# Altium PCB S7CAS-PLEIADES-CARTE-MERE_P01.PcbDoc (part 3 of 3)
Units mil, origin at the board's own origin, x right, y up, seen from the top; angles counter-clockwise.
Board outline 5000 x 5000 mil, 4 copper layers (Top, Ground Plane, Power Plane, Bottom), stack 67.086 mil thick; 430 components, 327 nets, 2174 pads, 171 vias.
Unrouted connection lines stored in the file: 1387.
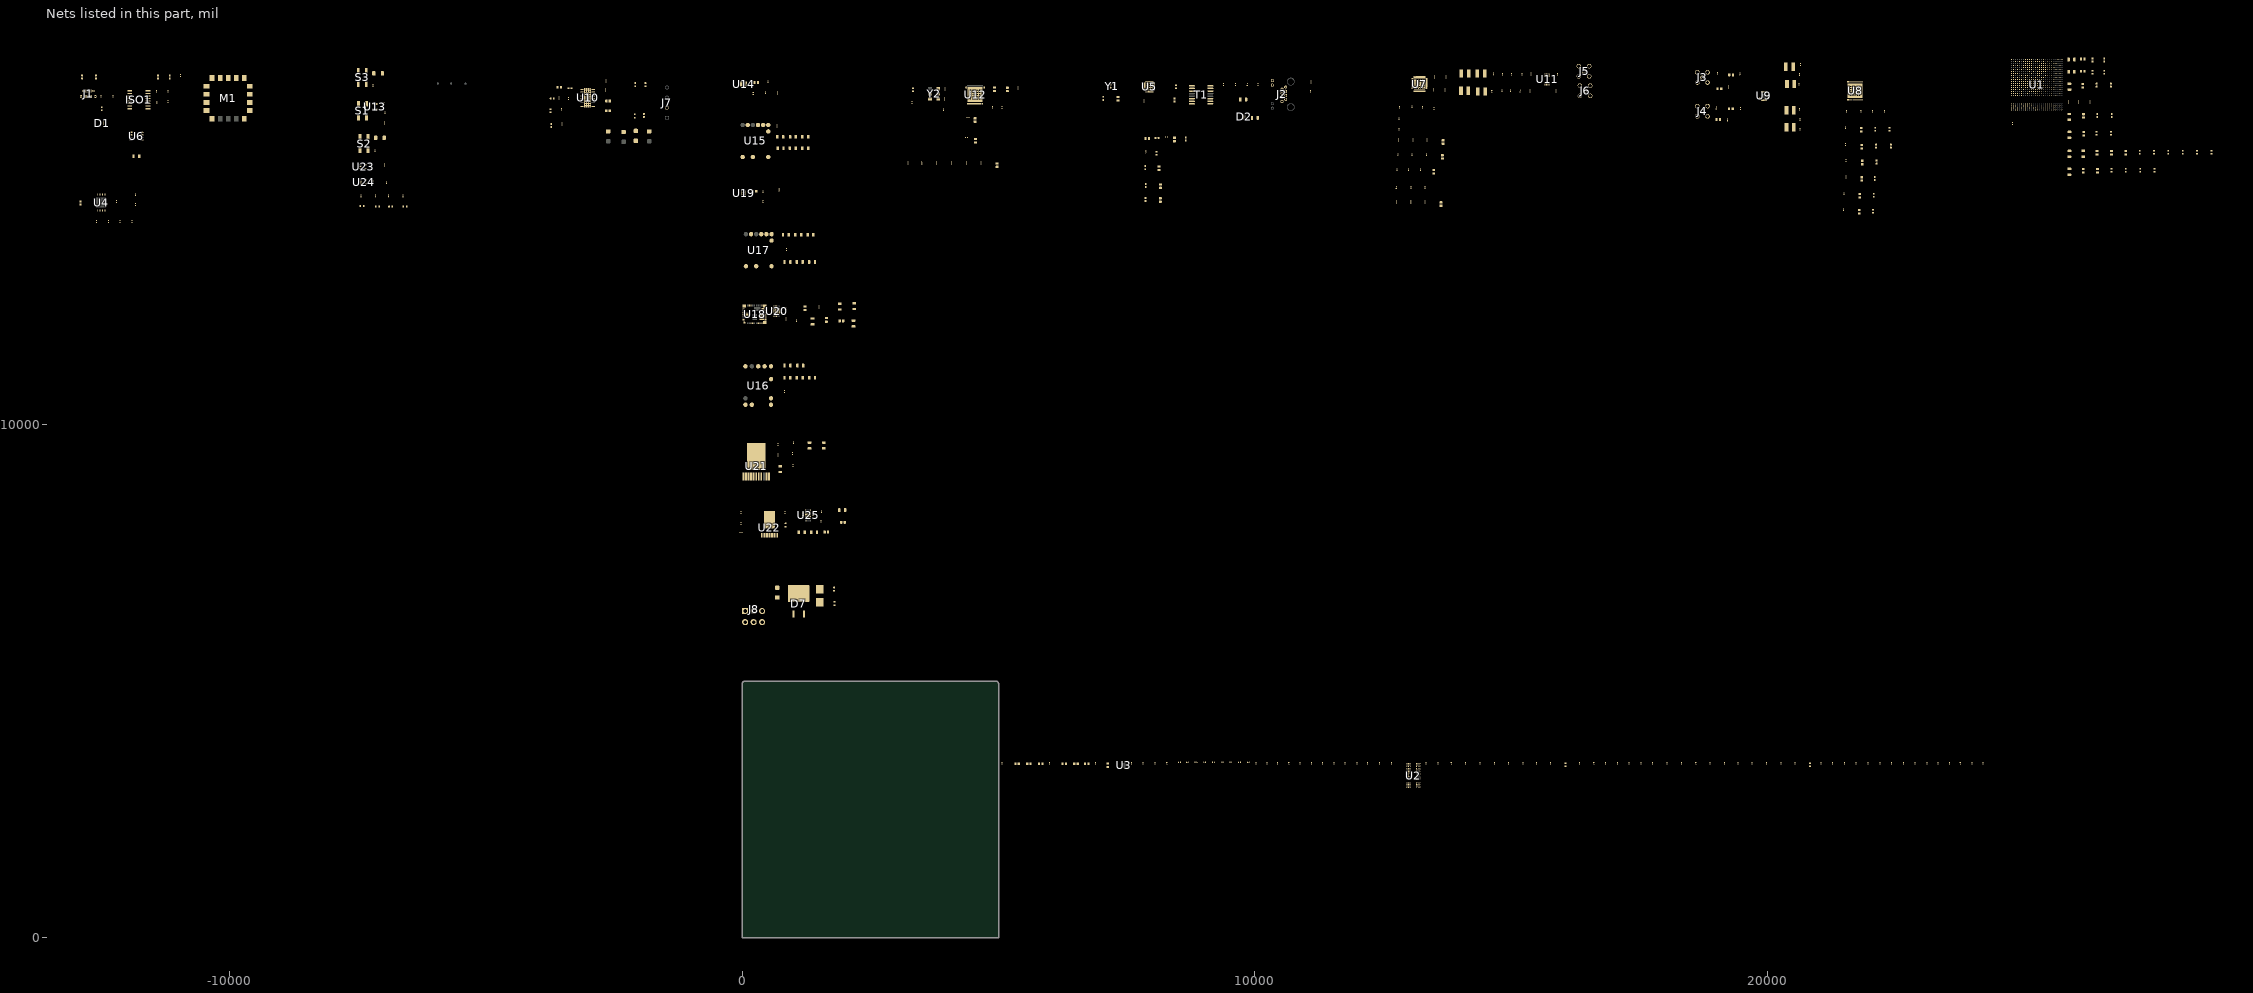
[diagram p5: the nets of this part, all layers, seen from the top]

## Part data (continued)
R126: "102 kOhms ±0.05% 0.125W, 1/8W Chip Resistor 0805 (2012 Metric) Anti-Sulfur, Automotive AEC-Q200, Moisture Resistant Thin Film", Mfg Part Number=TNPU0805102KAYEA00, Package=0805, CreatedBy="Jonathan Bouchard", Mfg="Vishay Dale", Precision=1%
R127: "65.7 kOhms ±0.5% 0.1W, 1/10W Chip Resistor 0603 (1608 Metric) Thin Film", Mfg Part Number=RT0603DRE0765K7L, Package=0603, CreatedBy="Jonathan Bouchard", Mfg=YAGEO, Precision=1%
R133: "25.5 kOhms ±0.1% 0.063W, 1/16W Chip Resistor 0402 (1005 Metric) Automotive AEC-Q200 Thin Film", Mfg Part Number=ERA-2AEB2552X, Package=0402, Power=1/16W, Voltage=50V, CreatedBy="Jonathan Bouchard", Mfg="Panasonic Electronic Components", Precision=1%
S1 S2 S3: library part SWI_TACT_B3SN-3012P_1, "SWI - SWITCH TACTILE SPST-NO 0.05A 24V -SMD", Current Rating=50mA, Manufacturer #1="Omron Electronics Inc-EMC Div", Package=SMD, Supplier Part Number 1=SW261CT-ND, Temperature="-25°C ~ 70°C", Voltage Rating=24VDC, CreatedBy/Date="Olivier Bernard / 5/12/2017", Cryo=UNKNOWN, GRAMS Lib Spec=2.8, HelpURL=http://omronfs.omron.com/en_US/ecb/products/pdf/en-b3sn.pdf, Magnetic Material=UNKNOWN, Mfg Part Number=B3SN-3012P, Part Number #1=B3SN-3012P, Polarized=No, Supplier 1=Digi-Key, VerifiedBy="Caroline Paulin / 11 juillet 2018"
T1: library part TRANSFO_H1102NLT, "TRANSFO - ETHERNET 10/100B-TX - SMD-16", Package=SMD-16, Supplier Part Number 1=553-1532-1-ND, Temperature="-40°C to 85°C", CreatedBy="Jonathan Bouchard", HelpURL=http://media.digikey.com/pdf/Data%20Sheets/Pulse%20PDFs/10_100BASE-T%20Single%20Port%20SMD%20Magnetics_Rev2008.pdf, Mfg="Pulse Eng.", Mfg Part Number=H1102NLT, Part Number #1=H1102NLT, Supplier 1=Digikey
U1: library part FPGA_XC6SLX100-3FGG676C, "FPGA - XILINX SPARTAN 6 480 I/O - BGA-676", Package=BGA-676, Supplier Part Number 1=122-1760-ND, Temperature="0°C ~ 85°C (TJ)", Voltage="1.14 V ~ 1.26 V", CreatedBy="Jonathan Bouchard", HelpURL=https://www.xilinx.com/support/documentation/data_sheets/ds162.pdf, Mfg=Xilinx, Mfg Part Number=XC6SLX100-3FGG676C, Part Number #1=XC6SLX100-3FGG676C, Supplier 1=Digikey
U2: library part "MEM_DDR3_MT41J128M16JT-125:K TR", "MEM - DDR3 SDRAM 2GBIT 800MHZ - TFBGA-96", Package=TFBGA-96, Supplier Part Number 1=557-1611-1-ND, Temperature="0°C ~ 95°C (TC)", Voltage="1.425 V ~ 1.575 V", CreatedBy="Jonathan Bouchard", HelpURL=http://www.micron.com/~/media/Documents/Products/Data%20Sheet/DRAM/DDR3/2Gb_DDR3_SDRAM.pdf, Mfg=Micrel, Mfg Part Number=MT41J128M16JT-125, Part Number #1=MT41J128M16JT-125, Supplier 1=Digikey
U3: library part REG_PMIC_TPS51200DRCT, "REG - DDR TERMINATION/REF REG - 10-VFDFN", Current Rating="Source: 3A~4.5A, Sink: 3.5A~5.5A", Manufacturer #1="Texas Instruments", Package=10-VFDFN, Supplier Part Number 1=296-23830-1-ND, Temperature="-40°C ~ 85°C", Voltage Rating="2.375V ~ 3.5V", CreatedBy/Date="Joel Lemay 2019-03-19", Cryo=UNKNOWN, GRAMS Lib Spec=2.8, HelpURL=http://www.ti.com/lit/ds/symlink/tps51200.pdf, Magnetic Material=Unknown, Mfg Part Number=TPS51200DRCT, Part Number #1=TPS51200DRCT, Polarized=Yes, Supplier 1=Digi-Key, VerifiedBy="Nicolas V. (2019-05-31)"
U4: library part CMP-0677-00004-1, "Low-Voltage, Serial Flash Memory with SPI Bus Interface, 128 Mbit, 54 MHz, 2.7 to 3.6 V, 8-Pin VDFPN (MLP), RoHS, Tape and Reel", Generic Part Number=M25P128, Supply Voltage Max="3.6 V", Supply Voltage Min="2.7 V", Temperature Max="85 degC", Temperature Min="-40 degC", DatasheetVersion="Rev. 6", Memory Size="128 Mbits", Mfg Part Number=M25P128-VME6TGB, PackageDescription="8-Pin Very Thin Dual Flat Package No lead, Body 8 x 6 mm, Pitch 1.27 mm", Packing="Tape and Reel", Part Number #1=M25P128-VME6TGB, PartNumber=M25P128-VME6TGB, RoHS=TRUE
U5: library part COM_ETH_PHY_KSZ8091MNXCA, "COM - ETHERNET PHY 10/100 - QFN-32", Package=QFN-32, Supplier Part Number 1=576-4356-ND, Temperature="0°C ~ 70°C", Voltage="1.8V, 2.5V, 3.3V", CreatedBy="Jonathan Bouchard", HelpURL=http://ww1.microchip.com/downloads/en/DeviceDoc/00002275A.pdf, Mfg=Micrel, Mfg Part Number=KSZ8091MNXCA, Part Number #1=KSZ8091MNXCA, Supplier 1=Digikey
U6: library part ISO_SI8620BB-B-IS, "ISO - Dual-Channel Digital Isolator (default Low) - 8-SOIC", Manufacturer #1="Silicon Labs", Package=8-SOIC, Supplier Part Number 1=336-2567-ND, Temperature="-40°C ~ 125°C", Voltage Rating=2.5-5.5V, CreatedBy/Date="Joel Lemay 2018-06-05", Cryo=UNKNOWN, GRAMS Lib Spec=2.8, HelpURL=https://www.silabs.com/documents/public/data-sheets/si861x-2x-datasheet.pdf, Magnetic Material=Unknown, Mfg Part Number=SI8620BB-B-IS, Part Number #1=SI8620BB-B-IS, Polarized=Yes, Supplier 1=Digi-Key, VerifiedBy="Caroline Paulin - 12 sept 2018"
U7: library part DAC_AD9146BCPZ, "DAC - 16BIT SRL HIGH SPEED - QFN-48", Package=QFN-48, Supplier Part Number 1=AD9146BCPZ-ND, Temperature="-40°C ~ 85°C", Voltage="3.13 V ~ 3.47 V / 1.71 V ~ 1.89 V", CreatedBy="Jonathan Bouchard", HelpURL=http://www.analog.com/media/en/technical-documentation/data-sheets/AD9146.PDF, Mfg="Analog Devices Inc.", Mfg Part Number=AD9146BCPZ, Precision="16 Bit", Supplier 1=Digikey
U8: library part ADC_ADS62P48IRGCT, "ADC - 14 BIT 210MSPS SUAL - VQFN-64", Package=VQFN-64, Supplier Part Number 1=296-24611-1-ND, Temperature="-40°C ~ 85°C", Voltage="3.15 V ~ 3.6 V / 1.7 V ~ 1.9 V", CreatedBy="Jonathan Bouchard", HelpURL=http://www.ti.com/lit/ds/symlink/ads62p48.pdf, Mfg="Texas Instruments", Mfg Part Number=ADS62P48IRGCT, Precision="14 Bit", Supplier 1=Digikey
U9: library part OPAMP_ADA4927-2YCPZ-R2, "OPAMP - CFA 2.3GHZ - QFN-24", Current=65mA, Package=QFN-24, Supplier Part Number 1=ADA4927-2YCPZ-R2CT-ND, Temperature="-40°C ~ 105°C", Voltage="4.5 V ~ 11 V, ±2.25 V ~ 5.5 V", CreatedBy="Jonathan Bouchard", HelpURL=http://www.analog.com/media/en/technical-documentation/data-sheets/ADA4927-1_4927-2.pdf, Mfg="Analog Devices", Mfg Part Number=ADA4927-2YCPZ-R2, Supplier 1=Digikey
U10: library part POW_MOTOR_DRV8811PWPR, "POW - STEPPER MOTOR DRIVER - SOP-28", Package=SOP-28, Supplier Part Number 1=296-24591-1-ND, Temperature="-40°C ~ 150°C (TJ)", Voltage="3 V ~ 5.5 V / 8 V ~ 38 V", CreatedBy="Jonathan Bouchard", HelpURL=http://www.ti.com/lit/ds/symlink/drv8811.pdf, Mfg="Texas Instrument", Mfg Part Number=DRV8811PWPR, Supplier 1=Digikey
U11: library part OPAMP_AD8056ARMZ, "OPAMP - VFB 300MHZ - 8MSOP", Current=60mA, Package=MSOP-8, Supplier Part Number 1=AD8056ARMZ-REEL7CT-ND, Temperature="-40°C ~ 125°C", Voltage="8 V ~ 12 V, ±4 V ~ 6 V", CreatedBy="Jonathan Bouchard", HelpURL=http://www.analog.com/media/en/technical-documentation/data-sheets/AD8055_8056.pdf, Mfg="Analog Devices", Mfg Part Number=AD8056ARMZ, Supplier 1=Digikey
U12: library part TIM_CDCE62005RGZT, "TIM - CLK SYNTH JITTER CLEANER 3:5 - QFN-48", Package=QFN-48, Supplier Part Number 1=296-23947-1-ND, Temperature="-40°C ~ 85°C", Voltage="3 V ~ 3.6 V", CreatedBy="Jonathan Bouchard", HelpURL=http://www.ti.com/lit/ds/symlink/cdce62005.pdf, Mfg="Texas Instruments", Mfg Part Number=CDCE62005RGZT, Supplier 1=Digikey
U13: library part POW_RESET_TPS3808G01DBVR, "POW - VOLT SUPERVISOR ADJ - SOT23-6", Package=SOT23-6, Supplier Part Number 1=296-17188-6-ND, Temperature="-40°C ~ 125°C (TJ)", CreatedBy="Jonathan Bouchard", HelpURL=http://www.ti.com/lit/ds/symlink/tps3808.pdf, Mfg="Texas Instruments", Mfg Part Number=TPS3808G01DBVR, Supplier 1=Digikey
U14 U19: library part REG_LDO_NCP59744MN1ADJTBG, "REG - LINEAR POS ADJ 3A BIAS - 10-VFDFN", Current Rating=3A, Manufacturer #1="ON Semiconductor", Manufacturer #2=-, Package=10-VFDFN, Power Max=10.8W, Supplier Part Number 1=NCP59744MN1ADJTBGOSCT-ND, Temperature="-40°C ~ 125°C (TJ)", Voltage Rating="(Vout+VDO) ~ 5.5V", CreatedBy/Date="Raphael Bouchard / 2019-06-07", Cryo=UNKNOWN, GRAMS Lib Spec=2.8, HelpURL=https://www.onsemi.com/pub/Collateral/NCP59744-D.PDF, Magnetic Material=Unknown, Mfg Part Number=NCP59744MN1ADJTBG, Part Number #1=NCP59744MN1ADJTBG, Part Number #2=-, Polarized=Yes, Supplier 1=Digi-Key, Tolerance=-, VerifiedBy="C.Paulin - 13/06/2019"
U15 U17: library part REG_SWR_PTH04T231WAZ, "REG - MODULE PIP 6A 2.2V/5.5V - 10SMD", Current Rating="6A (out)", Manufacturer #1="Texas Instruments", Package=SMD, Supplier Part Number 1=296-21792-ND, Temperature="-40°C ~ 85°C", Voltage Rating="2.2-5.5V (Input)", CreatedBy/Date="Olivier Bernard / 6/5/2018", Cryo=UNKNOWN, HelpURL=http://www.ti.com/lit/ds/symlink/pth04t231w.pdf, Magnetic Material=UNKNOWN, Mfg Part Number=PTH04T231WAZ, Part Number #1=PTH04T231WAZ, Polarized=Yes, Supplier 1=Digi-Key, VerifiedBy="Caroline Paulin / 10 juillet 2018"
U16: library part REG_SWR_PTH08T241WAZ, "REG - MODULE PIP 10A 14VIN - 11-SMD", Current Rating="10A (out)", Manufacturer #1="Texas Instruments", Package=SMD, Supplier Part Number 1=296-21339-ND, Temperature="-40°C ~ 85°C", Voltage Rating="4.5-14V (Input), 0.69 - 5.5V (Out)", CreatedBy/Date="Olivier Bernard / 6/5/2018", Cryo=UNKNOWN, HelpURL=http://www.ti.com/lit/ds/symlink/pth08t241w.pdf, Magnetic Material=UNKNOWN, Mfg Part Number=PTH08T241WAZ, Part Number #1=PTH08T241WAZ, Polarized=Yes, Supplier 1=Digi-Key, VerifiedBy="Caroline Paulin / 10 juillet 2018"
U18: library part REG_SWR_LMZ34002RKGR, "REG - DC DC Converter -3V to -17V 2A - 41-B1QFN", Current Rating=2A, Manufacturer #1="Texas Instruments", Package=41-B1QFN, Power Max=15W, Supplier Part Number 1=296-44356-1-ND, Temperature="-40°C ~ 85°C", Voltage Rating=4.5-40V, CreatedBy/Date="P.Marcoux  20-06-2019", Cryo=UNKNOWN, GRAMS Lib Spec=2.8c, HelpURL=http://www.ti.com/lit/ds/symlink/lmz34002.pdf, Magnetic Material=Unknown, Mfg Part Number=LMZ34002RKGR, Part Number #1=LMZ34002RKGR, Polarized=Yes, Supplier 1=Digi-Key, VerifiedBy="C.Paulin - 22/01/2020"
U20: library part REG_LDO_TPS7A3301RGWR, "REG - LDO Negative Adjustable 1 Output -1.18V-33V 1A -  20-VQFN (5x5)", Current Rating=1A, Manufacturer #1="Texas Instruments", Package=20-VQFN, Supplier Part Number 1=296-39502-1-ND, Temperature="-40°C ~ 125°C", Voltage Rating=-36V, CreatedBy/Date="Keven Deslandes - 2018/10/11", Cryo=UNKNOWN, GRAMS Lib Spec=2.8, HelpURL=http://www.ti.com/lit/ds/symlink/tps7a33.pdf, Magnetic Material=Unknown, Mfg Part Number=TPS7A3301RGWR, Part Number #1=TPS7A3301RGWR, Polarized=Yes, Supplier 1=Digi-Key, VerifiedBy="Caroline Paulin - 11/12/2018"
U21: library part CMP-0069-02067-2, "10A SIMPLE SWITCHER® Power Module with 36V Maximum Input Voltage and Current Sharing, 11 pin TO-PMOD, 32 Rail", Manufacturer="Texas Instruments", PackageTopMarking=NSUZXYTTE#*LMZ23610, PowerWise=N, PackageDescription="TO-PMOD, 15 x 15 x 5.9 mm Body, 11 Lead, 1.27 mm Pitch, Surface Mount", PackageReference=NDY0011A, PinCount=11, RoHS=Y
U22: library part CMP-0069-02076-2, "3A SIMPLE SWITCHER® Power Module with 36V Maximum Input Voltage, 7 pin TO-PMOD, 250 Reel", Manufacturer="Texas Instruments", PackageTopMarking=NSUZXYTTE#*LMZ23603, PowerWise=N, ComponentLink1Description="Datasheet URL", ComponentLink1URL=http://www.ti.com/general/docs/lit/getliterature.tsp?genericPartNumber=LMZ23603&fileType=pdf, CompType=Switcher, PackageDescription="TO-PMOD-7, 10.16 x 9.85 x 4.57 mm Body, 7 Lead, 1.27mm Pitch, Surface Mount", PackageReference=NDW0007A, PinCount=7, RoHS=Y
U23 U24: library part SENS_TEMP_TC74A0-3.3VCTTR, "SENS - TEMPERATURE SENSOR I2C/SMBUS - SOT23-5", Package=SOT23-5, Supplier Part Number 1=TC74A0-3.3VCTDKR-ND, Temperature="-40°C ~ 125°C", Voltage="2.7 V ~ 5.5 V", CreatedBy="Jonathan Bouchard", HelpURL=http://ww1.microchip.com/downloads/en/DeviceDoc/21462D.pdf, Mfg=Microchip, Mfg Part Number=TC74A0-3.3VCTTR, Precision="±2°C (±3°C)", Supplier 1=Digikey
U25: library part REG_LDO_TPS7A4701RGWR, "REG - LINEAR POS ADJ 1A - 20VQFN", Current Rating=1A, Manufacturer #1="Texas Instruments", Manufacturer #2=TBD, Package="20-VQFN Exposed Pad", Supplier Part Number 1=296-37224-1-ND, Temperature="-40°C ~ 125°C", Tolerance=-, Voltage Rating="35V max", Assembly Type=SMD, CreatedBy/Date="L-P Gauthier / 2018-05-29", Cryo=UNKNOWN, GRAMS Lib Spec=2.8, HelpURL=http://www.ti.com/lit/ds/symlink/tps7a47.pdf, Magnetic Material=Unknown, Part Number #1=TPS7A4701RGWR, Part Number #2=TBD, Polarized=Yes, Supplier 1=Digi-Key, VerifiedBy="Caroline Paulin - 28 sept 2018"
Y1: library part OSC_ASDMB-25.000MHZ-LC-T, "OSC - 25MHz XO (Standard) LVCMOS - 4-SMD, No Lead", Manufacturer #1="Abracon LLC", Package="4-SMD, No Lead", Supplier Part Number 1=535-11730-1-ND, Temperature="-40°C ~ +85°C", Tolerance=±50ppm, Voltage Rating="1.8V ~ 3.3V", CreatedBy/Date="Joël Lemay 2019-03-29", Cryo=UNKNOWN, GRAMS Lib Spec=2.8, HelpURL=https://abracon.com/Oscillators/ASDMB.pdf, Magnetic Material=Unknown, Mfg Part Number=ASDMB-25.000MHZ-LC-T, Part Number #1=ASDMB-25.000MHZ-LC-T, Polarized=Yes, Supplier 1=Digi-Key, VerifiedBy="C. Paulin - 29 mai 2019"
Y2: library part OSC_590BD-BDG, "TIM - OSC PROG 125MHz ~ 214.999MHz LVDS 3.3V 7PPM EN/DS - 6-SMD", Current Rating="100 mA (supply)", Manufacturer #1="Silicon Labs", Package=6-SMD, Supplier Part Number 1=590BD-BDG-ND, Temperature="-40°C ~ 85°C", Voltage Rating="3.3V (supply)", CreatedBy/Date="from 590BD-CDG", Cryo=UNKNOWN, GRAMS Lib Spec=2.8, HelpURL=https://www.silabs.com/documents/public/data-sheets/Si590-591.pdf, Magnetic Material=UNKNOWN, Mfg Part Number=590BD-BDG, Part Number #1=590BD-BDG, Polarized=Yes, Supplier 1=Digi-Key, VerifiedBy="Caroline Paulin / 3/10/2019"

## Via types
v1: diameter 19.68, hole 7.87, Top to Bottom, 135 vias
v2: diameter 19.68, hole 11.81, Top to Bottom, 15 vias
v3: diameter 15.75, hole 7.87, Top to Bottom, 12 vias
v4: diameter 22, hole 12, Top to Bottom, 9 vias

## Nets (pads, with @x,y where several pads share a name; then routed paths per layer and width w, separated by ;. In a path a pad name is that pad's centre, name@x,y a point inside that pad or via, vN(x,y) a via of type N, cw(c..) or ccw(c..) an arc to the next point about the centre after c; other vN are vias at no path point)
1V2: C14.2 C38.2 C40.2 C134.2 C135.2 C136.2 C137.2 C138.2 C139.2 C140.2 U1.K11 U1.K17 U1.L10 U1.L12 U1.L14 U1.L16 U1.M11 U1.M13 U1.M15 U1.N12 U1.N14 U1.N16 U1.P11 U1.P13 U1.P15 U1.R12 U1.R14 U1.R16 U1.T11 U1.T13 U1.T15 U1.T17 U1.U10 U1.U16 U16.5 U16.6
5V: C41.2 C87.2 C88.2 C90.2 C91.2 C92.2 C96.2 C97.2 C98.2 C109.2 C110.2 R124.2 U15.2 U15.9 U16.2 U16.10 U17.2 U17.9 U19.1 U19.2 U19.4 U19.5 U21.10 U21.11
5V_AMP: C68.2 C188.2 C189.2 C190.2 C191.2 C213.2 C214.2 C215.2 C216.2 C217.2 C218.2 R133.2 U9.3 U9.4 U9.9 U9.10 U9.14 U9.20 U11.8 U25.1 U25.20
6V: C36.2 C82.2 C83.2 R127.2 U22.7 U25.13 U25.15 U25.16
+24V: C15.1 C72.2 C76.2 C81.2 C105.2 C108.2 D7.4 F1.2 R55.2 R107.2 R120.2 R135.2 U10.15 U10.28 U18.26 U21.1 U21.2 U22.1
-5V_AMP: C112.2 C192.2 C193.2 C194.2 C195.2 C207.2 C208.2 C209.2 C210.2 C211.2 C212.2 R125.2 U9.15 U9.16 U9.21 U9.22 U11.4 U20.1 U20.20
-8V: C61.2 C103.2 C104.2 R121.1 U18.1 U18.4 U18.5 U18.8 U18.9 U18.16 U18.17 U18.18 U18.19 U18.20 U18.29 U18.30 U18.32 U18.33 U18.34 U18.37 U18.40 U20.13 U20.15 U20.16
  other v2: 79.29,12116.14 110,12116.14 140.71,12116.14 79.29,12183.86 110,12183.86 140.71,12183.86
ANA_3V3: C102.2 C165.2 C166.2 C168.2 C169.2 C196.2 C197.2 C198.2 C199.2 R117.2 U7.37 U7.40 U7.45 U7.48 U8.16 U8.33 U8.34 U19.9 U19.10
CAN_CLK_N: C100.2 R60.1 U12.20
CAN_CLK_P: C99.2 R59.2 U12.19
CAN_CLKOUT_N: U1.A14 U8.57
CAN_CLKOUT_P: U1.B14 U8.56
CAN_CM: U8.23 U9.11 U9.17
CAN_CTRL1: U1.M3 U8.35
CAN_CTRL2: U1.M1 U8.36
CAN_CTRL3: U1.L2 U8.37
CAN_DA0_N: U1.G14 U8.40
CAN_DA0_P: U1.J14 U8.41
CAN_DA2_N: U1.D15 U8.42
CAN_DA2_P: U1.E14 U8.43
CAN_DA4_N: U1.C16 U8.44
CAN_DA4_P: U1.D16 U8.45
CAN_DA6_N: U1.F15 U8.46
CAN_DA6_P: U1.G16 U8.47
CAN_DA8_N: U1.E17 U8.50
CAN_DA8_P: U1.F17 U8.51
CAN_DA10_N: U1.E16 U8.52
CAN_DA10_P: U1.F16 U8.53
CAN_DA12_N: U1.A17 U8.54
CAN_DA12_P: U1.C17 U8.55
CAN_DB0_N: U1.H15 U8.60
CAN_DB0_P: U1.J15 U8.61
CAN_DB2_N: U1.C18 U8.62
CAN_DB2_P: U1.D18 U8.63
CAN_DB4_N: U1.D19 U8.2
CAN_DB4_P: U1.E19 U8.3
CAN_DB6_N: U1.G17 U8.4
CAN_DB6_P: U1.H16 U8.5
CAN_DB8_N: U1.C20 U8.6
CAN_DB8_P: U1.D21 U8.7
CAN_DB10_N: U1.E18 U8.8
CAN_DB10_P: U1.F18 U8.9
CAN_DB12_N: U1.D20 U8.10
CAN_DB12_P: U1.E20 U8.11
CAN_IN1_N: R88.1 U8.30
CAN_IN1_P: R87.1 U8.29
CAN_IN2_N: R74.1 U8.20
CAN_IN2_P: R70.1 U8.19
CAN_RESET: U1.K8 U8.12
CAN_SCLK: U1.L8 U8.13
CAN_SDATA: U1.N1 U8.14
CAN_SDOUT: U1.L1 U8.64
CAN_SEN: U1.N2 U8.15
CCLK: R34.1 R35.2 U1.AD22 U4.6
CLK_1V8: C7.2 C8.2 C9.2 C55.2 C56.2 C59.2 C118.2 C130.2 C131.2 C132.2 C133.2 C200.2 C201.2 C202.2 C203.2 C204.2 C205.2 C206.2 U1.D2 U1.F4 U1.H2 U1.J6 U1.K4 U1.M2 U7.1 U7.2 U7.8 U7.29 U7.35 U8.1 U8.38 U8.48 U8.58 U15.4 U15.5
CLK_OSI_125M_OE: U1.U15 Y2.2
CLK_PLL_LOCK: U1.AD11 U12.37
CLK_PWRDN: U1.V14 U12.12
CLK_SPI_CLK: U1.AB11 U12.24
CLK_SPI_LE: U1.AA11 U12.25
CLK_SPI_MISO: R54.2 U1.W14
CLK_SPI_MOSI: U1.V13 U12.23
CLK_SYNC: U1.AC11 U12.14
CNA_CLK_N: C95.2 R91.1
CNA_CLK_P: C94.2 R72.2 U12.16 U12.17
CNA_CS: U1.H1 U7.33
CNA_D0_N: U1.D7 U7.28
CNA_D0_P: U1.E8 U7.27
CNA_D1_N: U1.C8 U7.26
CNA_D1_P: U1.D8 U7.25
CNA_D2_N: U1.E9 U7.24
CNA_D2_P: U1.F9 U7.23
CNA_D3_N: U1.A8 U7.22
CNA_D3_P: U1.B8 U7.21
CNA_D4_N: U1.A9 U7.16
CNA_D4_P: U1.C9 U7.15
CNA_D5_N: U1.F10 U7.14
CNA_D5_P: U1.E10 U7.13
CNA_D6_N: U1.C10 U7.12
CNA_D6_P: U1.D10 U7.11
CNA_D7_N: U1.A10 U7.10
CNA_D7_P: U1.B10 U7.9
CNA_DCI_N: U1.F11 U7.18
CNA_DCI_P: U1.D11 U7.17
CNA_FRAME_N: U1.A11 U7.20
CNA_FRAME_P: U1.C11 U7.19
CNA_IRQ: U1.G2 U7.34
CNA_RESET: U1.J2 U7.36
CNA_SCLK: U1.J1 U7.32
CNA_SDIO: U1.H3 U7.31
CNA_TX_ENABLE: U1.G1 U7.30
CONN_4_5: J2.4 J2.5 R51.2
CONN_7_8: J2.7 J2.8 R52.2
CSO_B: R39.1 U1.AF4 U4.1
DD_N: M1.16 R43.2
DD_P: M1.17 R45.2
DDR3_A0: R1.1 U1.N7 U2.N3
DDR3_A1: R2.1 U1.N6 U2.P7
DDR3_A2: R3.1 U1.R9 U2.P3
DDR3_A3: R4.1 U1.P7 U2.N2
DDR3_A4: R5.1 U1.N9 U2.P8
DDR3_A5: R6.1 U1.R2 U2.P2
DDR3_A6: R7.1 U1.R1 U2.R8
DDR3_A7: R8.1 U1.P10 U2.R2
DDR3_A8: R9.1 U1.N4 U2.T8
DDR3_A9: R10.1 U1.N3 U2.R3
DDR3_A10: R11.1 U1.M10 U2.L7
DDR3_A11: R12.1 U1.L3 U2.R7
DDR3_A12: R13.1 U1.M8 U2.N7
DDR3_A13: R14.1 U1.M6 U2.T3
DDR3_BA0: R15.1 U1.P3 U2.M2
DDR3_BA1: R16.1 U1.P1 U2.N8
DDR3_BA2: R17.1 U1.N5 U2.M3
DDR3_CAS: R22.1 U1.P8 U2.K3
DDR3_CK_N: R27.1 U1.R3 U2.K7
DDR3_CK_P: R26.2 U1.R4 U2.J7
DDR3_CKE: U1.M9 U2.K9
DDR3_CS: R20.1 R29.1 U2.L2
DDR3_DQ0: U1.Y3 U2.E3
DDR3_DQ1: U1.Y1 U2.F7
DDR3_DQ2: U1.W2 U2.F2
DDR3_DQ3: U1.W1 U2.F8
DDR3_DQ4: U1.T3 U2.H3
DDR3_DQ5: U1.T1 U2.H8
DDR3_DQ6: U1.U2 U2.G2
DDR3_DQ7: U1.U1 U2.H7
DDR3_DQ8: U1.AA2 U2.D7
DDR3_DQ9: U1.AA1 U2.C3
DDR3_DQ10: U1.AE2 U2.C8
DDR3_DQ11: U1.AE1 U2.C2
DDR3_DQ12: U1.AD3 U2.A7
DDR3_DQ13: U1.AD1 U2.A2
DDR3_DQ14: U1.AB3 U2.B8
DDR3_DQ15: U1.AB1 U2.A3
DDR3_LDM: U1.W3 U2.E7
DDR3_LDQS_N: U1.V1 U2.G3
DDR3_LDQS_P: U1.V3 U2.F3
DDR3_ODT: R24.1 U1.P6 U2.K1
DDR3_RAS: R21.1 U1.N8 U2.J3
DDR3_RESET: R25.2 U1.L4 U2.T2
DDR3_UDM: U1.V4 U2.D3
DDR3_UDQS_N: U1.AC1 U2.B7
DDR3_UDQS_P: U1.AC2 U2.C7
DDR3_WE: R23.1 U1.P5 U2.L3
DIN: R33.1 U1.AD20
DONE: R38.1 U1.AF23
ETH_3V3: C101.2 C106.2 C156.2 C157.2 L1.1 U5.3
ETH_COL: U1.AD21 U5.28
ETH_CRS: U1.Y18 U5.29
ETH_INTR: U1.AA19 U5.21
ETH_MDC: U1.AC20 U5.12
ETH_MDIO: U1.AF19 U5.11
ETH_RST: R57.2 U1.AE19 U5.32
ETH_RXC: U1.AE13 U5.19
ETH_RXD0: U1.V16 U5.16
ETH_RXD1: U1.W17 U5.15
ETH_RXD2: U1.AD18 U5.14
ETH_RXD3: U1.AF18 U5.13
ETH_RXDV: U1.AC19 U5.18
ETH_RXER: U1.AD19 U5.20
ETH_TXC: U1.AF13 U5.22
ETH_TXD0: U1.AA18 U5.24
ETH_TXD1: U1.AB18 U5.25
ETH_TXD2: U1.AE17 U5.26
ETH_TXD3: U1.AF17 U5.27
ETH_TXEN: U1.Y16 U5.23
ETH_TXER: U1.AA17 U5.31
FPGA_CLK_N: U1.AF14 U12.28
FPGA_CLK_P: U1.AD14 U12.27
GND_USB: C47.2 C119.1 C120.1 D1.4 ISO1.2 ISO1.8 J1.5 R46.1 U6.4
INIT_B: R36.1 U1.AE4
IO_BUTTON1: D8.K R105.2 S2.1 S2.2 U1.W11
IO_BUTTON2: D9.K R106.2 S3.1 S3.2 U1.AD8
IO_LED1: R100.2 U1.U13
IO_LED2: R101.2 U1.U12
IO_LED3: R102.2 U1.Y10
IO_LED4: R103.2 U1.AB10
IO_SCLK_TEMP1: R129.1 U1.AF8 U23.4
IO_SCLK_TEMP2: R131.1 U1.AD9 U24.4
IO_TEMP1: R130.1 U1.AC9 U23.5
IO_TEMP2: R132.1 U1.AA9 U24.5
LED: J2.9 R48.2 U5.30
M0: C1.2 C4.2 C5.2 C6.2 C25.2 C33.2 C34.2 C35.2 C37.2 C62.2 C63.2 C64.2 C65.2 C66.2 C67.2 C71.2 C85.2 C86.2 C117.2 C121.2 C122.2 C123.2 C124.2 C125.2 C141.2 C142.2 C143.2 C144.2 C145.2 C146.2 C147.2 C148.2 C149.2 C150.2 C151.2 C177.2 C178.2 C179.2 C180.2 C186.2 C187.2 C219.2 C220.2 C221.2 C222.2 C223.2 C224.2 C225.2 ISO1.12 ISO1.13 ISO1.14 ISO1.16 L1.2 L2.2 L3.2 M1.8 M1.15 R30.2 R34.2 R36.2 R37.2 R38.2 R39.2 R47.2 R58.2 R92.2 R95.2 R104.2 R105.1 R106.1 R108.2 R112.2 R129.2 R130.2 R131.2 R132.2 U1.AA6 U1.AA10 U1.AA16 U1.AA21 U1.AB14 U1.AB23 U1.AC10 U1.AC18 U1.AC21 U1.AD25 U1.AE8 U1.AE12 U1.AE16 U1.AE20 U1.AF22 U1.B3 U1.B7 U1.B11 U1.B15 U1.B19 U1.C22 U1.D9 U1.D17 U1.D25 U1.E13 U1.F6 U1.F21 U1.F23 U1.G10 U1.G12 U1.G15 U1.G18 U1.H14 U1.H25 U1.J9 U1.J18 U1.J21 U1.K13 U1.K23 U1.L5 U1.L22 U1.M17 U1.M20 U1.M25 U1.N10 U1.P23 U1.T25 U1.U6 U1.U14 U1.U18 U1.V9 U1.V21 U1.W23 U1.Y12 U1.Y17 U1.Y19 U1.Y25 U3.10 U4.3 U4.7 U4.8 U5.17 U6.8 U10.10 U12.1 U12.8 U12.11 U12.15 U12.18 U12.21 U12.26 U12.29 U12.32 U12.44 U12.47 U13.6 U14.1 U14.2 U14.4 U14.5 U17.4 U17.5 U23.3 U24.3 Y1.1 Y1.4 Y2.6
M1: C1.1 C2.1 C3.1 C4.1 C5.1 C6.1 C7.1 C8.1 C9.1 C10.2 C11.1 C12.1 C13.1 C14.1 C16.1 C17.1 C18.1 C19.1 C20.1 C21.1 C22.1 C23.1 C24.1 C25.1 C26.1 C27.1 C28.1 C29.1 C30.1 C31.1 C32.1 C33.1 C34.1 C35.1 C36.1 C37.1 C38.1 C39.1 C40.1 C41.1 C42.1 C43.1 C44.1 C45.1 C46.1 C47.1 C48.1 C49.1 C50.1 C55.1 C56.1 C57.1 C58.1 C59.1 C60.1 C61.1 C62.1 C63.1 C64.1 C65.1 C66.1 C67.1 C68.1 C69.1 C70.1 C71.1 C72.1 C73.1 C74.1 C75.1 C76.1 C78.1 C79.1 C80.1 C81.1 C82.1 C83.1 C84.1 C85.1 C86.1 C87.1 C88.1 C89.1 C90.1 C91.1 C92.1 C93.1 C96.1 C97.1 C98.1 C101.1 C102.1 C103.1 C104.1 C105.1 C106.1 C107.1 C108.1 C109.1 C110.1 C111.1 C112.1 C113.1 C114.1 C115.1 C116.1 C117.1 C118.1 C121.1 C122.1 C123.1 C124.1 C125.1 C126.1 C127.1 C128.1 C129.1 C130.1 C131.1 C132.1 C133.1 C134.1 C135.1 C136.1 C137.1 C138.1 C139.1 C140.1 C141.1 C142.1 C143.1 C144.1 C145.1 C146.1 C147.1 C148.1 C149.1 C150.1 C151.1 C152.1 C153.1 C154.1 C155.1 C156.1 C157.1 C158.1 C159.1 C160.1 C161.1 C162.1 C163.1 C164.1 C165.1 C166.1 C167.1 C168.1 C169.1 C170.1 C171.1 C172.1 C173.1 C174.1 C175.1 C176.1 C177.1 C178.1 C179.1 C180.1 C181.1 C182.1 C183.1 C184.1 C185.1 C186.1 C187.1 C188.1 C189.1 C190.1 C191.1 C192.1 C193.1 C194.1 C195.1 C196.1 C197.1 C198.1 C199.1 C200.1 C201.1 C202.1 C203.1 C204.1 C205.1 C206.1 C207.1 C208.1 C209.1 C210.1 C211.1 C212.1 C213.1 C214.1 C215.1 C216.1 C217.1 C218.1 C219.1 C220.1 C221.1 C222.1 C223.1 C224.1 C225.1 D3.K D4.K D5.K D6.K D7.1 D7.3 D8.A D9.A D10.K D15.2 D??.2 ISO1.9 ISO1.15 J3.2 J3.3 J3.4 J3.5 J4.2 J4.3 J4.4 J4.5 J5.2 J5.3 J5.4 J5.5 J6.2 J6.3 J6.4 J6.5 J8.4 J8.5 J8.6 M1.1 M1.7 M1.14 R25.1 R28.2 R29.2 R32.2 R35.1 R41.1 R48.1 R56.1 R57.1 R63.1 R65.2 R66.1 R73.1 R77.1 R78.1 R79.1 R84.1 R85.1 R86.1 R89.1 R93.1 R94.1 R96.1 R97.1 R98.1 R99.1 R109.1 R110.1 R111.1 R113.1 R115.1 R116.1 R118.1 R119.1 R122.1 R123.1 R126.1 R128.1 R134.1 R136.1 S1.1 S1.2 S2.3 S2.4 S3.3 S3.4 U1.A1 U1.A26 U1.AA20 U1.AB2 U1.AB12 U1.AB16 U1.AB19 U1.AB20 U1.AB25 U1.AC8 U1.AD16 U1.AD23 U1.AE6 U1.AE10 U1.AE14 U1.AE18 U1.AE22 U1.AF1 U1.AF26 U1.B5 U1.B9 U1.B13 U1.B17 U1.B21 U1.D4 U1.E7 U1.E11 U1.E15 U1.E22 U1.F2 U1.F19 U1.F25 U1.H4 U1.H11 U1.H23 U1.J8 U1.J19 U1.K2 U1.K16 U1.K25 U1.L11 U1.L13 U1.L15 U1.M5 U1.M12 U1.M14 U1.M16 U1.M22 U1.N11 U1.N13 U1.N15 U1.P2 U1.P12 U1.P14 U1.P16 U1.P19 U1.P25 U1.R8 U1.R11 U1.R13 U1.R15 U1.T5 U1.T12 U1.T14 U1.T16 U1.T21 U1.U11 U1.V2 U1.V25 U1.W15 U1.W20 U1.W21 U1.Y4 U1.Y7 U1.Y11 U1.Y23 U2.A9 U2.B1 U2.B3 U2.B9 U2.D1 U2.D8 U2.E1 U2.E2 U2.E8 U2.F9 U2.G1 U2.G8 U2.G9 U2.J2 U2.J8 U2.M1 U2.M9 U2.P1 U2.P9 U2.T1 U2.T9 U3.4 U3.8 U4.4 U5.1 U5.33 U5.34 U5.35 U5.36 U5.37 U5.38 U5.39 U5.40 U5.41 U5.42 U6.5 U7.5 U7.41 U7.44 U7.PAD U8.17 U8.18 U8.21 U8.24 U8.27 U8.28 U8.31 U8.32 U8.39 U8.49 U8.59 U8.PAD U10.7 U10.21 U10.PAD U12.36 U12.PAD U13.2 U14.6 U14.11 U15.1 U15.3 U15.6 U16.1 U16.3 U16.4 U16.7 U17.1 U17.3 U17.6 U18.10 U18.11 U18.12 U18.13 U18.14 U18.15 U18.39 U19.6 U19.11 U20.7 U20.21 U21.3 U21.5 U21.6 U21.12 U22.2 U22.4 U22.8 U23.2 U24.2 U25.7 U25.E1 Y1.2 Y2.3
  other v1: -3063.31,16206.77 -3020,16206.77 -2976.69,16206.77 -3063.31,16250.08 -3020,16250.08 -2976.69,16250.08 -3063.31,16293.39 -3020,16293.39 -2976.69,16293.39 -3063.31,16336.69 -3020,16336.69 -2976.69,16336.69 4453.23,16357.2 4496.54,16357.2 4539.84,16357.2 4583.15,16357.2 4626.46,16357.2 -3063.31,16380 -3020,16380 -2976.69,16380 4453.23,16400.51 4496.54,16400.51 4539.84,16400.51 4583.15,16400.51 4626.46,16400.51 -3063.31,16423.31 -3020,16423.31 -2976.69,16423.31 21623.39,16433.39 21666.69,16433.39 21710,16433.39 21753.31,16433.39 21796.61,16433.39 4453.23,16443.82 4496.54,16443.82 4539.84,16443.82 4583.15,16443.82 4626.46,16443.82 -3063.31,16466.61 -3020,16466.61 -2976.69,16466.61 21623.39,16476.69 21666.69,16476.69 21710,16476.69 21753.31,16476.69 21796.61,16476.69 4453.23,16487.13 4496.54,16487.13 4539.84,16487.13 4583.15,16487.13 4626.46,16487.13 -3063.31,16509.92 -3020,16509.92 -2976.69,16509.92 21623.39,16520 21666.69,16520 21710,16520 21753.31,16520 21796.61,16520 4453.23,16530.43 4496.54,16530.43 4539.84,16530.43 4583.15,16530.43 4626.46,16530.43 -3063.31,16553.23 -3020,16553.23 -2976.69,16553.23 13123.39,16563.39 13166.69,16563.39 13210,16563.39 13253.31,16563.39 13296.61,16563.39 21623.39,16563.31 21666.69,16563.31 21710,16563.31 21753.31,16563.31 21796.61,16563.31 13123.39,16606.69 13166.69,16606.69 13210,16606.69 13253.31,16606.69 13296.61,16606.69 21623.39,16606.61 21666.69,16606.61 21710,16606.61 21753.31,16606.61 21796.61,16606.61 13123.39,16650 13166.69,16650 13210,16650 13253.31,16650 13296.61,16650 13123.39,16693.31 13166.69,16693.31 13210,16693.31 13253.31,16693.31 13296.61,16693.31 13123.39,16736.61 13166.69,16736.61 13210,16736.61 13253.31,16736.61 13296.61,16736.61
  other v2: 630.63,12180.63 670,12180.63 709.37,12180.63 630.63,12220 670,12220 709.37,12220 630.63,12259.37 670,12259.37 709.37,12259.37
  other v3: 4.45,14480.63 43.82,14480.63 4.45,14520 43.82,14520 4.45,14559.37 43.82,14559.37 4.45,16610.63 43.82,16610.63 4.45,16650 43.82,16650 4.45,16689.37 43.82,16689.37
  other v4: 1241.81,8195.12 1281.18,8195.12 1320.55,8195.12 1241.81,8234.49 1281.18,8234.49 1320.55,8234.49 1241.81,8273.86 1281.18,8273.86 1320.55,8273.86
MOSI: U1.AF21 U4.5
MOT_DIR: U1.R20 U10.3
MOT_ENABLE: U1.R18 U10.26
MOT_HOME: U1.R22 U10.2
MOT_RESET: U1.T22 U10.17
MOT_SLEEP: U1.R17 U10.27
MOT_SR: U1.R21 U10.16
MOT_STEP: U1.R19 U10.19
MOT_USM0: U1.P18 U10.13
MOT_USM1: U1.P17 U10.12
NetC2_2: C2.2 R95.1 R96.2 U10.5
NetC3_2: C3.2 U22.6
NetC10_1: C10.1 U10.20
NetC15_2: C15.2 U10.22
NetC26_2: C26.2 R31.2 R32.1 U3.1
NetC46_2: C46.2 R49.1 R50.1 R51.1 R52.1
NetC48_2: C48.2 D2.3 D2.8
NetC51_1: C51.1 L5.2 R76.2
NetC51_2: C51.2 L4.2 R71.2
NetC52_1: C52.1 L7.2 R83.2
NetC52_2: C52.2 L6.2 R81.2
NetC53_1: C53.1 L9.2 R88.2
NetC53_2: C53.2 L8.2 R87.2
NetC54_1: C54.1 L11.2 R74.2
NetC54_2: C54.2 L10.2 R70.2
NetC77_1: C77.1 U10.24
NetC77_2: C77.2 U10.23
NetC79_2: C79.2 R98.2 U10.6
NetC80_2: C80.2 R99.2 U10.9
NetC84_2: C84.2 U12.48
NetC93_2: C93.2 U7.42
NetC94_1: C94.1 U7.3 U7.6
NetC95_1: C95.1 U7.4 U7.7
NetC99_1: C99.1 U8.25
NetC100_1: C100.1 U8.26
NetC107_2: C107.2 U21.8
NetC111_2: C111.2 U20.14
NetC113_2: C113.2 L2.1 U12.5 U12.39 U12.42
NetC114_2: C114.2 L3.1 U12.34 U12.35
NetC115_2: C115.2 U12.38
NetC116_2: C116.2 U12.4
NetD3_A: D3.A R100.1
NetD4_A: D4.A R101.1
NetD5_A: D5.A R102.1
NetD6_A: D6.A R103.1
NetD10_A: D10.A R107.1
NetD15_1: D15.1 F1.1 J8.1 J8.2 J8.3
NetD??_1: D??.1@-2076.03,15543.54 J7.2 U10.25
NetISO1_6: ISO1.6 R44.1
NetISO1_7: ISO1.7 R42.1
NetISO1_10: ISO1.10 R45.1
NetISO1_11: ISO1.11 R43.1
NetJ1_6: J1.6 J1.7 J1.8 J1.9 J1.10 J1.11 R46.2
NetJ2_10: J2.10 R47.1
NetJ3_1: J3.1 R62.2 R63.2
NetJ4_1: J4.1 R69.2 R73.2
NetJ5_1: J5.1 R75.1
NetJ6_1: J6.1 R82.1
NetL4_1: L4.1 R78.2 U7.47
NetL5_1: L5.1 R77.2 U7.46
NetL6_1: L6.1 R85.2 U7.38
NetL7_1: L7.1 R84.2 U7.39
NetL8_1: L8.1 U9.19
NetL9_1: L9.1 U9.18
NetL10_1: L10.1 U9.13
NetL11_1: L11.1 U9.12
NetM1_10: M1.10 U1.E21
NetM1_11: M1.11 U1.A24
NetM1_12: M1.12 U1.F20
NetM1_13: M1.13 U1.C23
NetM1_18: M1.18 R40.1 R41.2
NetR26_1: R26.1 R27.2
NetR28_1: R28.1 U2.L8
NetR33_2: R33.2 U4.2
NetR54_1: R54.1 U12.22
NetR55_1: R55.1 R56.2 U21.4
NetR59_1: R59.1 R60.2
NetR61_1: R61.1 U9.23
NetR61_2: R61.2 R62.1 U9.24
NetR64_1: R64.1 R75.2 U11.1
NetR64_2: R64.2 R71.1 U11.2
NetR65_1: R65.1 U7.43
NetR66_2: R66.2 R67.2 U9.1
NetR67_1: R67.1 U9.2
NetR68_1: R68.1 U9.5
NetR68_2: R68.2 R69.1 U9.6
NetR72_1: R72.1 R91.2
NetR76_1: R76.1 R79.2 U11.3
NetR80_1: R80.1 R82.2 U11.7
NetR80_2: R80.2 R81.1 U11.6
NetR83_1: R83.1 R86.2 U11.5
NetR89_2: R89.2 R90.2 U9.7
NetR90_1: R90.1 U9.8
NetR92_1: R92.1 R93.2 U10.8
NetR94_2: R94.2 U10.1
NetR97_2: R97.2 U10.14
NetR104_1: R104.1 R112.1 U13.4
NetR108_1: R108.1 U12.3
NetR109_2: R109.2 U12.30
NetR110_2: R110.2 U12.2
NetR111_2: R111.2 U12.43
NetR113_2: R113.2 U17.7
NetR114_1: R114.1 R115.2 U14.8
NetR116_2: R116.2 U15.7
NetR117_1: R117.1 R118.2 U19.8
NetR119_2: R119.2 U16.8
NetR120_1: R120.1 R121.2 U18.27
NetR122_2: R122.2 U18.36
NetR123_2: R123.2 R124.1 U21.7
NetR125_1: R125.1 R126.2 U20.3
NetR127_1: R127.1 R128.2 U22.5
NetR133_1: R133.1 R134.2 U25.3
NetR135_1: R135.1 R136.2 U22.3
NetS1_3: S1.3 S1.4 U13.3
NetU12_45: U12.45 Y2.4
NetU12_46: U12.46 Y2.5
OSC_25MHZ: U5.9 Y1.3
PG_1V5: R53.1 U3.7 U14.3
PG_DDR3: R30.1 U3.9 U13.5
PROGRAM_B: M1.9 R37.1 R58.1 U1.AF3 U13.1
RDCT_ISO: C70.2 T1.7
RX_ETH_N: D2.2 J2.6 T1.9
RX_ETH_P: D2.1 J2.3 T1.11
RX_ISO_N: T1.8 U5.4
RX_ISO_P: T1.6 U5.5
RXCT_ETH: R50.2 T1.10
RXD_JTAG: M1.5 U1.Y13
TDCT_ISO: C69.2 T1.2
TX_ETH_N: D2.5 J2.2 T1.14
TX_ETH_P: D2.4 J2.1 T1.16
TX_ISO_N: T1.3 U5.6
TX_ISO_P: T1.1 U5.7
TXCT_ETH: R49.2 T1.15
TXD_JTAG: M1.6 U1.W13
UD_N: D1.3 J1.2 R44.2
UD_P: D1.5 J1.3 R42.2
VBUS_JTAG: R40.2 U6.7
VBUS_USB: C119.2 D1.1 ISO1.1 J1.1 U6.1 U6.2
VCC1V5: C27.2 C28.2 C57.2 C58.2 C60.2 C74.2 C75.2 C89.2 C126.2 C127.2 C128.2 C129.2 C152.2 C153.2 C154.2 C155.2 C158.2 C159.2 C160.2 C161.2 C162.2 C163.2 C164.2 C167.2 C170.2 R31.1 R53.2 R114.2 U1.AC6 U1.AD2 U1.M7 U1.P4 U1.P9 U1.T2 U1.T7 U1.W4 U1.W6 U1.Y2 U2.A1 U2.A8 U2.B2 U2.C1 U2.C9 U2.D2 U2.D9 U2.E9 U2.F1 U2.G7 U2.H2 U2.H9 U2.K2 U2.K8 U2.N1 U2.N9 U2.R1 U2.R9 U3.2 U14.9 U14.10
VDD1_UBS: C120.2 ISO1.3 ISO1.4 ISO1.5
VDD_1V2: C73.2 C78.2 C184.2 C185.2 U5.2
VREF0V75: C11.2 C12.2 C13.2 C50.2 U1.AD7 U1.L6 U1.R6 U1.V6 U2.H1 U2.M8 U3.6
VTT0V75: C16.2 C17.2 C18.2 C19.2 C20.2 C21.2 C22.2 C23.2 C24.2 C29.2 C30.2 C31.2 C32.2 C39.2 C42.2 C43.2 C44.2 C45.2 C49.2 C171.2 C172.2 C173.2 C174.2 C175.2 C176.2 C181.2 C182.2 C183.2 R1.2 R2.2 R3.2 R4.2 R5.2 R6.2 R7.2 R8.2 R9.2 R10.2 R11.2 R12.2 R13.2 R14.2 R15.2 R16.2 R17.2 R20.2 R21.2 R22.2 R23.2 R24.2 U3.3 U3.5
pads on no net: D1.2 D2.6 D2.7 D2.9 D2.10 D??.1@-1816.03,15533.54 D??.1@-2316.03,15523.54 D??.1@-2616.03,15533.54 FID1.1 FID1.2 FID2.1 FID2.2 FID3.1 FID3.2 J1.4 J2.0 J2.11 J2.12 J7.1 J7.3 J7.4 J8.0 M1.2 M1.3 M1.4 T1.4 T1.5 T1.12 T1.13 U1.A2 U1.A3 U1.A4 U1.A5 U1.A6 U1.A7 U1.A12 U1.A13 U1.A15 U1.A16 U1.A18 U1.A19 U1.A20 U1.A21 U1.A22 U1.A23 U1.A25 U1.AA3 U1.AA4 U1.AA5 U1.AA7 U1.AA8 U1.AA12 U1.AA13 U1.AA14 U1.AA15 U1.AA22 U1.AA23 U1.AA24 U1.AA25 U1.AA26 U1.AB4 U1.AB5 U1.AB6 U1.AB7 U1.AB8 U1.AB9 U1.AB13 U1.AB15 U1.AB17 U1.AB21 U1.AB22 U1.AB24 U1.AB26 U1.AC3 U1.AC4 U1.AC5 U1.AC7 U1.AC12 U1.AC13 U1.AC14 U1.AC15 U1.AC16 U1.AC17 U1.AC22 U1.AC23 U1.AC24 U1.AC25 U1.AC26 U1.AD4 U1.AD5 U1.AD6 U1.AD10 U1.AD12 U1.AD13 U1.AD15 U1.AD17 U1.AD24 U1.AD26 U1.AE3 U1.AE5 U1.AE7 U1.AE9 U1.AE11 U1.AE15 U1.AE21 U1.AE23 U1.AE24 U1.AE25 U1.AE26 U1.AF2 U1.AF5 U1.AF6 U1.AF7 U1.AF9 U1.AF10 U1.AF11 U1.AF12 U1.AF15 U1.AF16 U1.AF20 U1.AF24 U1.AF25 U1.B1 U1.B2 U1.B4 U1.B6 U1.B12 U1.B16 U1.B18 U1.B20 U1.B22 U1.B23 U1.B24 U1.B25 U1.B26 U1.C1 U1.C2 U1.C3 U1.C4 U1.C5 U1.C6 U1.C7 U1.C12 U1.C13 U1.C14 U1.C15 U1.C19 U1.C21 U1.C24 U1.C25 U1.C26 U1.D1 U1.D3 U1.D5 U1.D6 U1.D12 U1.D13 U1.D14 U1.D22 U1.D23 U1.D24 U1.D26 U1.E1 U1.E2 U1.E3 U1.E4 U1.E5 U1.E6 U1.E12 U1.E23 U1.E24 U1.E25 U1.E26 U1.F1 U1.F3 U1.F5 U1.F7 U1.F8 U1.F12 U1.F13 U1.F14 U1.F22 U1.F24 U1.F26 U1.G3 U1.G4 U1.G5 U1.G6 U1.G7 U1.G8 U1.G9 U1.G11 U1.G13 U1.G19 U1.G20 U1.G21 U1.G22 U1.G23 U1.G24 U1.G25 U1.G26 U1.H5 U1.H6 U1.H7 U1.H8 U1.H9 U1.H10 U1.H12 U1.H13 U1.H17 U1.H18 U1.H19 U1.H20 U1.H21 U1.H22 U1.H24 U1.H26 U1.J3 U1.J4 U1.J5 U1.J7 U1.J10 U1.J11 U1.J12 U1.J13 U1.J16 U1.J17 U1.J20 U1.J22 U1.J23 U1.J24 U1.J25 U1.J26 U1.K1 U1.K3 U1.K5 U1.K6 U1.K7 U1.K9 U1.K10 U1.K12 U1.K14 U1.K15 U1.K18 U1.K19 U1.K20 U1.K21 U1.K22 U1.K24 U1.K26 U1.L7 U1.L9 U1.L17 U1.L18 U1.L19 U1.L20 U1.L21 U1.L23 U1.L24 U1.L25 U1.L26 U1.M4 U1.M18 U1.M19 U1.M21 U1.M23 U1.M24 U1.M26 U1.N17 U1.N18 U1.N19 U1.N20 U1.N21 U1.N22 U1.N23 U1.N24 U1.N25 U1.N26 U1.P20 U1.P21 U1.P22 U1.P24 U1.P26 U1.R5 U1.R7 U1.R10 U1.R23 U1.R24 U1.R25 U1.R26 U1.T4 U1.T6 U1.T8 U1.T9 U1.T10 U1.T18 U1.T19 U1.T20 U1.T23 U1.T24 U1.T26 U1.U3 U1.U4 U1.U5 U1.U7 U1.U8 U1.U9 U1.U17 U1.U19 U1.U20 U1.U21 U1.U22 U1.U23 U1.U24 U1.U25 U1.U26 U1.V5 U1.V7 U1.V8 U1.V10 U1.V11 U1.V12 U1.V15 U1.V17 U1.V18 U1.V19 U1.V20 U1.V22 U1.V23 U1.V24 U1.V26 U1.W5 U1.W7 U1.W8 U1.W9 U1.W10 U1.W12 U1.W16 U1.W18 U1.W19 U1.W22 U1.W24 U1.W25 U1.W26 U1.Y5 U1.Y6 U1.Y8 U1.Y9 U1.Y14 U1.Y15 U1.Y20 U1.Y21 U1.Y22 U1.Y24 U1.Y26 U2.J1 U2.J9 U2.L1 U2.L9 U2.M7 U2.T7 U3.11 U4.9 U5.8 U5.10 U6.3 U6.6 U8.22 U9.PAD U10.4 U10.11 U10.18 U12.6 U12.7 U12.9 U12.10 U12.13 U12.31 U12.33 U12.40 U12.41 U12.49 U12.50 U12.51 U12.52 U12.53 U12.54 U12.55 U12.56 U12.57 U12.58 U12.59 U12.60 U12.61 U12.62 U12.63 U12.64 U14.7 U15.8 U15.10 U16.9 U16.11 U17.8 U17.10 U18.2 U18.3 U18.6 U18.7 U18.21 U18.22 U18.23 U18.24 U18.25 U18.28 U18.31 U18.35 U18.38 U18.41 U19.3 U19.7 U20.2 U20.4 U20.5 U20.6 U20.8 U20.9 U20.10 U20.11 U20.12 U20.17 U20.18 U20.19 U21.9 U23.1 U24.1 U25.2 U25.4 U25.5 U25.6 U25.8 U25.9 U25.10 U25.11 U25.12 U25.14 U25.17 U25.18 U25.19 Y2.1
copper on no net: | length 19957.1
  Top w5: 0,0 0,4950 cw(c50,4950) 50,5000 4950,5000 cw(c4950,4950) 5000,4950 5000,0 0,0
  other v1: 7440,3322.6 7417.36,3360 7462.64,3360 7440,3397.4 -12588.74,14261.26 -12549.37,14261.26 -12510,14261.26 -12470.63,14261.26 -12431.26,14261.26 -12588.74,14300.63 -12549.37,14300.63 -12510,14300.63 -12470.63,14300.63 -12431.26,14300.63 -12588.74,14340 -12549.37,14340 -12510,14340 -12470.63,14340 -12431.26,14340 -12588.74,14379.37 -12549.37,14379.37 -12510,14379.37 -12470.63,14379.37 -12431.26,14379.37 -12588.74,14418.74 -12549.37,14418.74 -12510,14418.74 -12470.63,14418.74 -12431.26,14418.74 19908.35,16398.35 19951.65,16398.35 19908.35,16441.65 19951.65,16441.65

## Polygon pours and split planes (outlines as drawn)
no net on Ground Plane (split plane): 4954.69,4979.62 4959.27,4978.52 4963.62,4976.72 4967.63,4974.26 4971.21,4971.21 4974.26,4967.63 4976.72,4963.62 4978.52,4959.27 4979.62,4954.69 4979.95,4950.5 4979.9,4950 4979.9,20.1 20.1,20.1 20.1,4950 20.05,4950.5 20.38,4954.69 21.48,4959.27 23.28,4963.62 25.74,4967.63 28.79,4971.21 32.37,4974.26 36.38,4976.72 40.73,4978.52 45.31,4979.62 49.5,4979.95 50,4979.9 4950,4979.9 4950.5,4979.95
no net on Power Plane (split plane): 4954.69,4979.62 4959.27,4978.52 4963.62,4976.72 4967.63,4974.26 4971.21,4971.21 4974.26,4967.63 4976.72,4963.62 4978.52,4959.27 4979.62,4954.69 4979.95,4950.5 4979.9,4950 4979.9,20.1 20.1,20.1 20.1,4950 20.05,4950.5 20.38,4954.69 21.48,4959.27 23.28,4963.62 25.74,4967.63 28.79,4971.21 32.37,4974.26 36.38,4976.72 40.73,4978.52 45.31,4979.62 49.5,4979.95 50,4979.9 4950,4979.9 4950.5,4979.95

## Silkscreen, mask and mechanical layers (free items; w line width, h text height)
Top Overlay:
  rectangle: -1261.38,2160.75 -752.79,2464.02
  lines w5: -1520,3460 -1520,3700 -430,3700 -430,3460 -1520,3460
  text "FPGA" at 25260,17814.67 h400
  text "USB" at -12132.97,17664.67 h400
  text "ETHERNET" at 8670,17630 h400
  text "ALIMS" at -160,17624.67 h400
  text "CLOCK" at 3720,17624.67 h400
  text "CNA" at 14100,17604.35 h400
  text "CAN" at 19970,17604.35 h400
  text "MOTORS" at -3100,17564.67 h400
  text "IO" at -7612.97,17484.67 h400
  text "FID" at -5900,17350 h400
  text "0" at -1322.86,4100 h787.4
  text ".Project_Name" at -1928.77,3700 h78.74
  text ".Project_Global" at -1478.77,3480 h39.37
  text ".Project_Revision" at -1340,3306.31 h40
  text "Revision" at -1243.7,3306.31 h40
  text ".Project_DateCode" at -1310,3240 h40
  text "Designed by:" at -1266,3100 h36
  text ".Project_Designer1" at -1313.15,3050.76 h36
  text ".Project_Designer2" at -1313.15,2980.51 h36
  text ".Project_Designer3" at -1313.15,2910.25 h36
  text ".Project_Designer4" at -1313.15,2840 h36
  text "Serial #" at -1264.6,2447.17 h39.37

## Text inside footprints (layer, text, board x,y; h text height)
D3: Top Overlay "+" at -7479.06,14289.68 h19.68
D4: Top Overlay "+" at -7176.57,14279.68 h19.68
D5: Top Overlay "+" at -6919.06,14279.68 h19.68
D6: Top Overlay "+" at -6639.06,14279.68 h19.68
D10: Top Overlay "+" at 1780.31,6458.46 h19.68 r90
J1: Top Assembly "Board Edge" at -12874.8,16315.51 h23.62
J2: Top Overlay "*" at 10870,16815 h65 r90
J7: Top Overlay "1" at -1434.57,15819.92 h65 r90; Top Assembly "INSERT WIRES ON THIS SIDE" at -1265.28,15902.6 h31.5 r90
U18: Top 3D Models "The 3D model is a 39pin instead of 41. For package representation only" at 90.31,12015.94 h3.94